# EAGLE board axiom_beta_shield_genio_v0.3_r1.2-Beta.41c98ec0 (EAGLE 7.7.0)
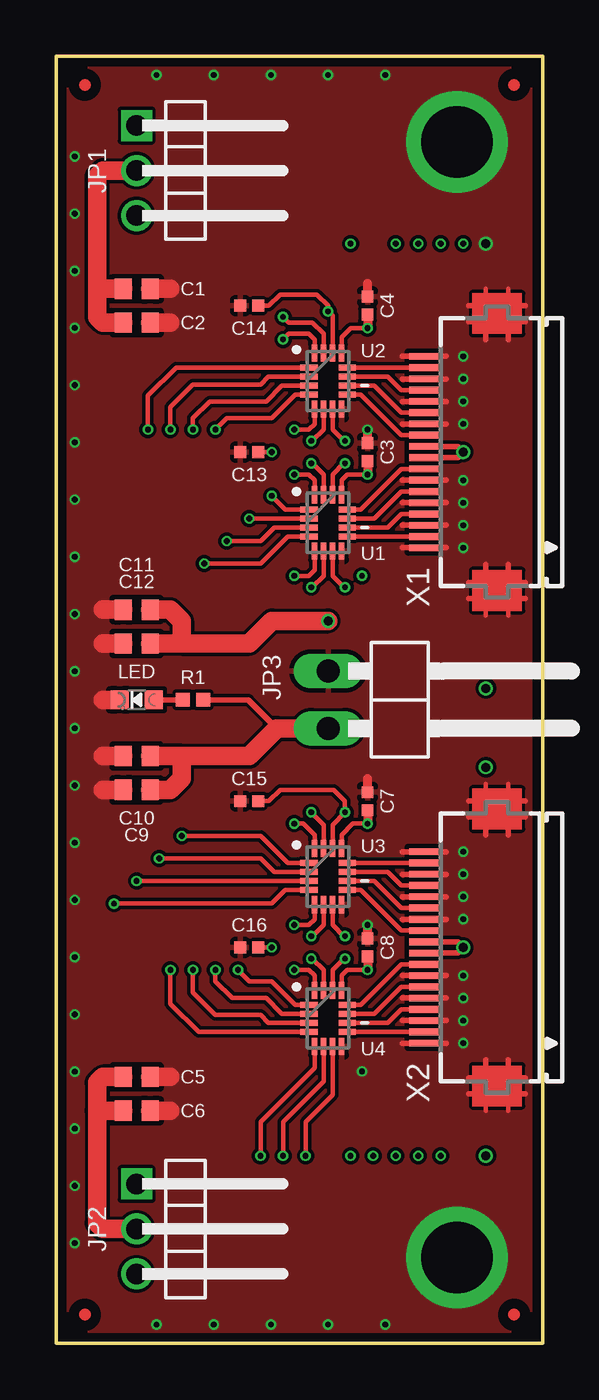
[diagram p0: board, top side]
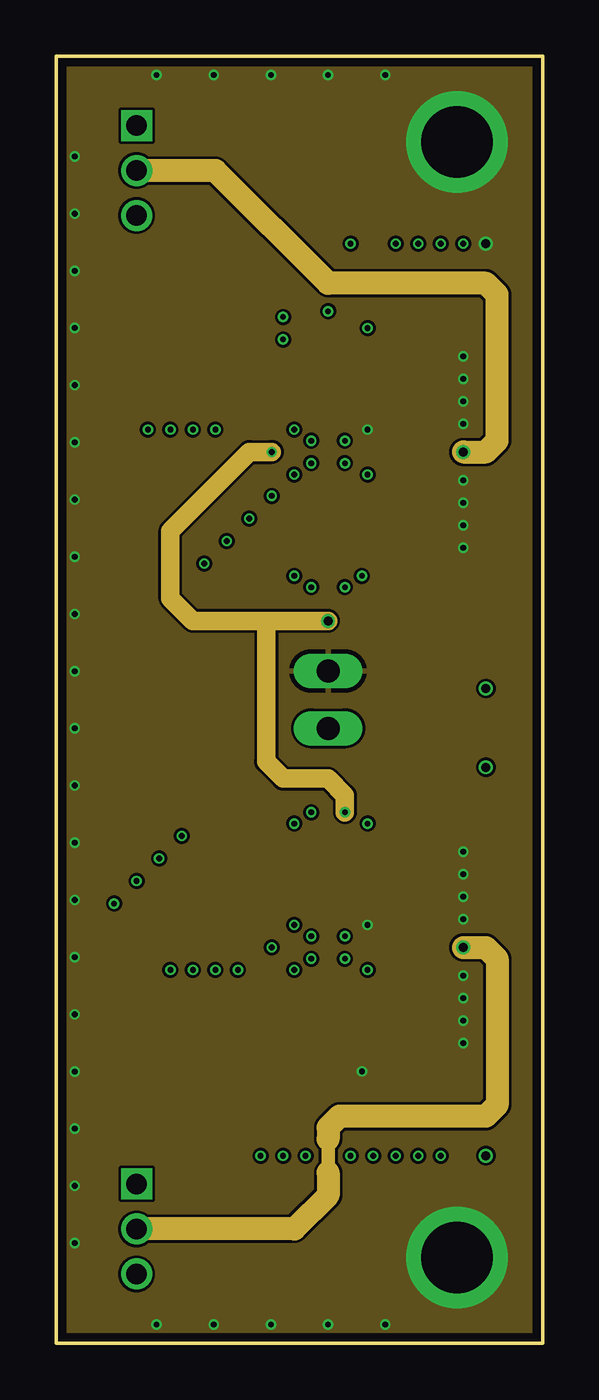
[diagram p1: board, inner layer Route2]
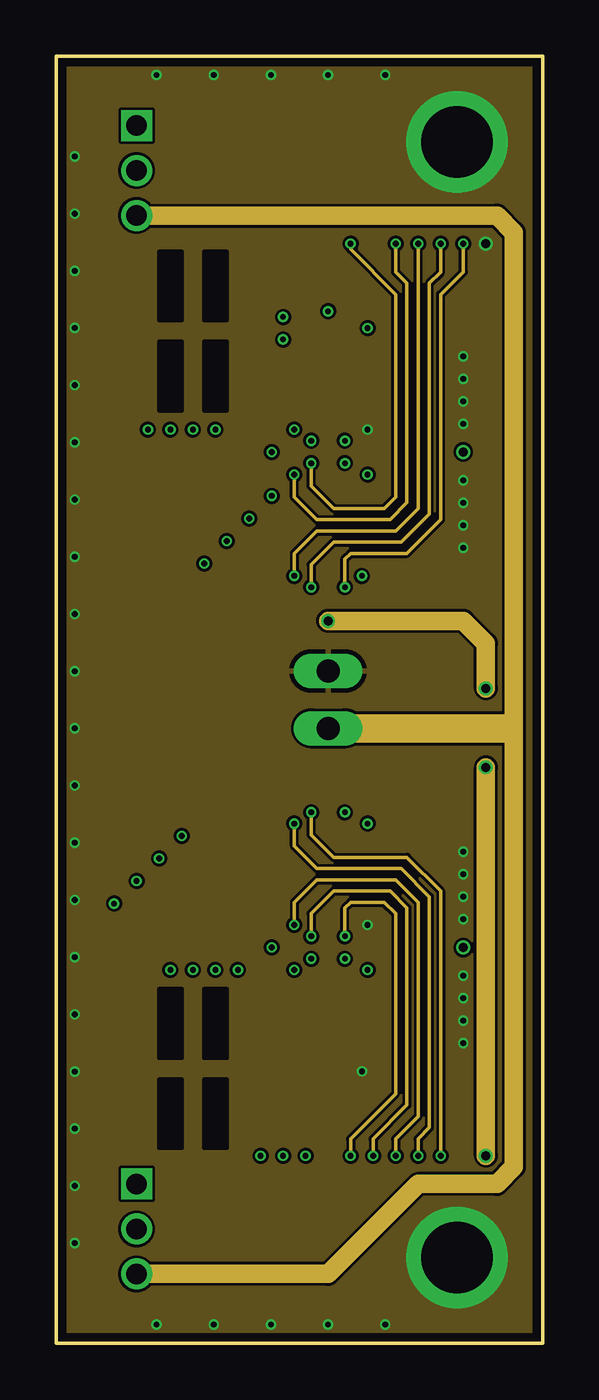
[diagram p2: board, inner layer Route15]
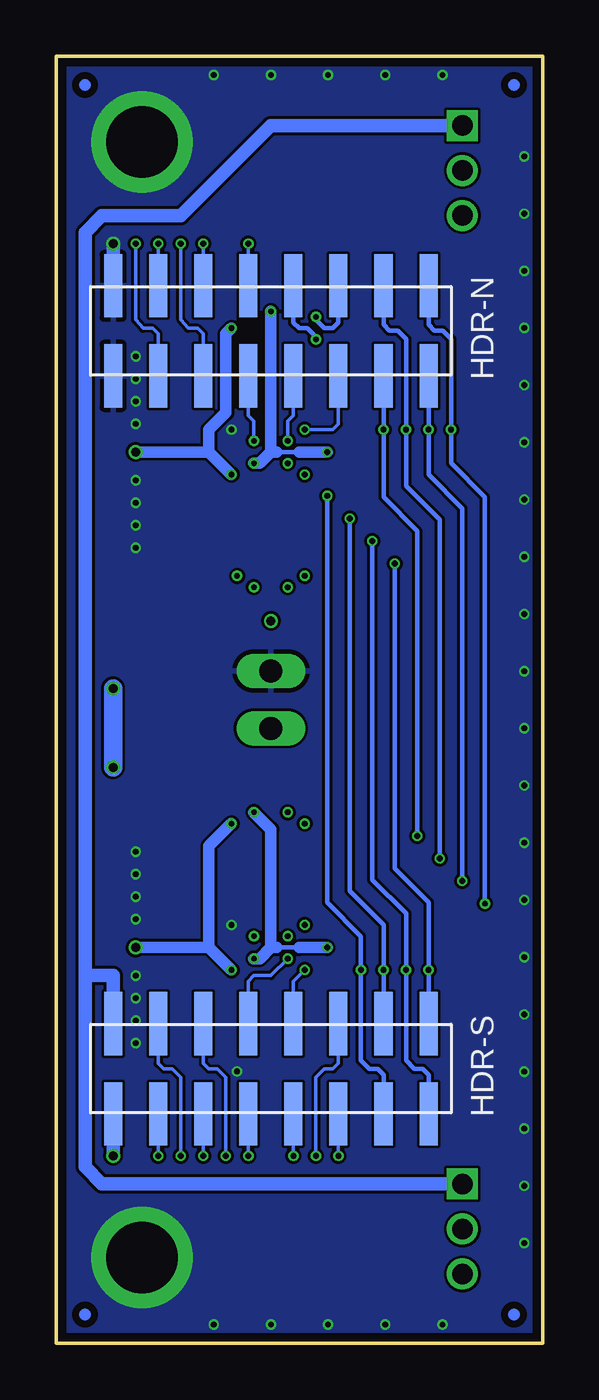
[diagram p3: board, bottom side, seen from below]

Size 21.59 x 57.15 mm. Coordinates in mm from the lower left corner, seen from the top.
Outline: 21.59,57.15 0,57.15 0,0 21.59,0 21.59,57.15
Copper layers (1+2*15+16): Top 0.035559375mm / dielectric 0.17018125mm / Route2 0.01778125mm / dielectric 47mil / Route15 0.01778125mm / dielectric 0.17018125mm / Bottom 0.035559375mm
Design rules "LaenPCBOrder4L_new": minimum track width 5mil, minimum drill 10mil, track to track 5mil, track to pad 5mil, pad to pad 5mil, via to via 5mil, smd to smd 5mil, copper to edge 15mil, drill to drill 5mil, minimum pad ring 4mil, minimum via ring 4mil, stop-mask expansion 2mil, vias tented up to drill 20mil, thermal gap 8mil
Net classes: 0 default: width 0.152 mm, drill 0.254 mm; 1 power: width 0.152 mm, drill 0.254 mm
tKeepout: area 15.3,50.8 to 20.3,55.8; area 15.3,1.3 to 20.3,6.3
bKeepout: area 15.3,50.8 to 20.3,55.8; area 15.3,1.3 to 20.3,6.3
tRestrict: area 19.8,0.7 to 20.9,1.8; area 19.8,55.3 to 20.9,56.4; area 0.7,55.3 to 1.8,56.4; area 0.7,0.7 to 1.8,1.8
bRestrict: area 19.8,0.7 to 20.9,1.8; area 19.8,55.3 to 20.9,56.4; area 0.7,55.3 to 1.8,56.4; area 0.7,0.7 to 1.8,1.8

## Footprints (pad centres in the part's own frame; a part is rotated, then mirrored left to right if it is on the bottom)
0603-C = smd 0.75 x 0.9: 1 -0.6,0; 2 0.6,0
0402-C = smd 0.52 x 0.52: 1 -0.4,0; 2 0.4,0
2X08M_SMD = smd 0.8 x 2.8: 1 -7,-2; 2 -7,2; 3 -5,-2; 4 -5,2; 5 -3,-2; 6 -3,2; 7 -1,-2; 8 -1,2; 9 1,-2; 10 1,2; 11 3,-2; 12 3,2; 13 5,-2; 14 5,2; 15 7,-2; 16 7,2
1X03M/90-S = drill 0.914 square: 1 -2,0 | drill 0.914: 2 0,0; 3 2,0
1X02/90 = drill 1.016 long: 1 -2.54,-3.81; 2 0,-3.81
CHIPLED_0603_NOOUTLINE = smd 0.8 x 0.8: A 0,-0.75; C 0,0.75
0402-B = smd 0.62 x 0.62: 1 -0.45,0; 2 0.45,0
QFN40P185X265X55-16N = smd 0.762 x 0.254: 1 -0.85,0.6; 2 -0.85,0.2; 3 -0.85,-0.2; 4 -0.85,-0.6; 9 0.85,-0.6; 10 0.85,-0.2; 11 0.85,0.2; 12 0.85,0.6 | smd 0.254 x 0.762: 5 -0.6,-1.25; 6 -0.2,-1.25; 7 0.2,-1.25; 8 0.6,-1.25; 13 0.6,1.25; 14 0.2,1.25; 15 -0.2,1.25; 16 -0.6,1.25
FH12-18S-0.5SH = smd 0.3 x 1.3: 1 -4.25,3.25; 2 -3.75,3.25; 3 -3.25,3.25; 4 -2.75,3.25; 5 -2.25,3.25; 6 -1.75,3.25; 7 -1.25,3.25; 8 -0.75,3.25; 9 -0.25,3.25; 10 0.25,3.25; 11 0.75,3.25; 12 1.25,3.25; 13 1.75,3.25; 14 2.25,3.25; 15 2.75,3.25; 16 3.25,3.25; 17 3.75,3.25; 18 4.25,3.25

## Placement (x,y rotation side)
C1  [0603-C]  3.56,46.83 0 top
C2  [0603-C]  3.56,45.33 0 top
C3  [0402-C]  13.81,39.58 90 top
C4  [0402-C]  13.81,46.08 90 top
C5  [0603-C]  3.56,11.82 0 top
C6  [0603-C]  3.56,10.32 0 top
C7  [0402-C]  13.81,24.07 90 top
C8  [0402-C]  13.81,17.57 90 top
C9  [0603-C]  3.56,24.57 180 top
C10  [0603-C]  3.56,26.07 180 top
C11  [0603-C]  3.56,32.58 180 top
C12  [0603-C]  3.56,31.07 180 top
C13  [0402-C]  8.56,39.58 180 top
C14  [0402-C]  8.56,46.08 180 top
C15  [0402-C]  8.56,24.07 180 top
C16  [0402-C]  8.56,17.57 180 top
HDR-N  [2X08M_SMD]  12.06,44.96 0 bottom
HDR-S  [2X08M_SMD]  12.06,12.19 0 bottom
JP1  [1X03M/90-S]  3.56,52.08 270 top
JP2  [1X03M/90-S]  3.56,5.07 270 top
JP3  [1X02/90]  15.88,27.3 270 top
LED  [CHIPLED_0603_NOOUTLINE]  3.56,28.57 90 top
R1  10k  [0402-B]  6.06,28.57 180 top
U1  SN74AVC4T774RSV  [QFN40P185X265X55-16N]  12.06,36.42 0 top
U2  SN74AVC4T774RSV  [QFN40P185X265X55-16N]  12.06,42.73 0 top
U3  SN74AVC4T774RSV  [QFN40P185X265X55-16N]  12.06,20.73 0 top
U4  SN74AVC4T774RSV  [QFN40P185X265X55-16N]  12.06,14.42 0 top
X1  FH12-18S-0.5SH  [FH12-18S-0.5SH]  19.56,39.58 90 top
X2  FH12-18S-0.5SH  [FH12-18S-0.5SH]  19.56,17.57 90 top

## Library data of the parts
C1-C16 R1 = generic-rcl
HDR-N HDR-S = pincon
JP1-JP3 = pinhead-2
LED = microbuilder
U1-U4 = lvltrans
X1 X2 = con-hirose; MPN: FH12-18S-0.5SH(55); OC_FARNELL: 1324547; OC_NEWARK: 34M6164

## Nets
0CH1: U1.9 X1.2
0CH2: U1.10 X1.4
0CH3: U1.11 X1.6
0CH4: U1.12 X1.8
0CH5: U2.9 X1.11
0CH6: U2.10 X1.13
0CH7: U2.11 X1.15
0CH8: U2.12 X1.17
0VCC: C1.1 C2.1 C3.1 C4.1 JP1.2 U1.13 U2.13 X1.9 X1.10
1CH1: U4.9 X2.2
1CH2: U4.10 X2.4
1CH3: U4.11 X2.6
1CH4: U4.12 X2.8
1CH5: U3.9 X2.11
1CH6: U3.10 X2.13
1CH7: U3.11 X2.15
1CH8: U3.12 X2.17
1VCC: C5.1 C6.1 C7.1 C8.1 JP2.2 U3.13 U4.13 X2.9 X2.10
3V3: HDR-S.2 JP1.1 JP2.1
GND: C1.2 C2.2 C3.2 C4.2 C5.2 C6.2 C7.2 C8.2 C9.2 C10.2 C11.2 C12.2 C13.2 C14.2 C15.2 C16.2 HDR-N.1 HDR-N.2 JP3.1 LED.C U1.8 U2.8 U3.8 U4.8 X1.1 X1.3 X1.5 X1.7 X1.12 X1.14 X1.16 X1.18 X2.1 X2.3 X2.5 X2.7 X2.12 X2.14 X2.16 X2.18
N$1: LED.A R1.2
SH_N_IO0: HDR-N.12 U2.15
SH_N_IO1: HDR-N.11 U2.5
SH_N_IO2: HDR-N.10 U2.16
SH_N_IO3: HDR-N.9 U2.6
SH_N_IO4: HDR-N.8 U1.15
SH_N_IO5: HDR-N.7 U2.7
SH_N_IO6: HDR-N.6 U1.16
SH_N_IO7: HDR-N.5 U1.5
SH_N_IO8: HDR-N.4 U1.6
SH_N_IO9: HDR-N.3 U1.7
SH_S_IO0: HDR-S.12 U4.6
SH_S_IO1: HDR-S.11 U4.5
SH_S_IO2: HDR-S.10 U4.16
SH_S_IO3: HDR-S.9 U4.7
SH_S_IO4: HDR-S.8 U4.15
SH_S_IO5: HDR-S.7 U3.7
SH_S_IO6: HDR-S.6 U3.6
SH_S_IO7: HDR-S.5 U3.5
SH_S_IO8: HDR-S.4 U3.16
SH_S_IO9: HDR-S.3 U3.15
VCCIO: C11.1 C12.1 C13.1 C14.1 C15.1 C16.1 HDR-S.1 U1.14 U2.14 U3.14 U4.14
VIN: C9.1 C10.1 JP1.3 JP2.3 JP3.2 R1.1
XX1_N: HDR-N.14 U2.3 U3.2
XX1_P: HDR-N.16 U2.1 U3.4
XX2_N: HDR-N.13 U2.4 U3.1
XX2_P: HDR-N.15 U2.2 U3.3
XX3_N: HDR-S.15 U1.3 U4.3
XX3_P: HDR-S.13 U1.1 U4.1
XX4_N: HDR-S.16 U1.4 U4.4
XX4_P: HDR-S.14 U1.2 U4.2

## Tracks (layer width: path | path; a pad name or v marks a point on that pad's centre or on a via)
0CH1
  Top 0.203: U1.9 X1.2
0CH2
  Top 0.203: X1.4 15.31,36.83 14.71,36.23 U1.10
0CH3
  Top 0.203: X1.6 15.31,37.83 14.11,36.62 U1.11
0CH4
  Top 0.203: X1.8 15.31,38.83 13.51,37.02 U1.12
0CH5
  Top 0.203: X1.11 15.31,40.33 13.51,42.12 U2.9
0CH6
  Top 0.203: X1.13 15.31,41.33 14.11,42.52 U2.10
0CH7
  Top 0.203: X1.15 15.31,42.33 14.71,42.92 U2.11
0CH8
  Top 0.203: U2.12 X1.17
0VCC  (via drill 0.25, 0.41)
  Top 0.203: v13.81,38.58 12.91,38.58 12.66,38.33 U1.13 | v13.81,45.08 13.06,45.08 12.66,44.67 U2.13
  Top 0.254: X1.10 17.81,39.83 v18.06,39.58 17.81,39.33 X1.9
  Top 0.406: C3.1 v13.81,38.58 | C4.1 v13.81,45.08
  Top 0.813: C2.1 2.06,45.33 1.81,45.58 1.81,46.83 | 1.81,46.83 C1.1 | 1.81,46.83 1.81,51.83 2.06,52.08 JP1.2
  Route2 1.016: v18.06,39.58 19.06,39.58 19.56,40.08 19.56,46.58 19.06,47.08 12.06,47.08 7.06,52.08 JP1.2
  Bottom 0.508: v13.81,45.08 14.06,44.83 14.06,41.33 14.81,40.58 14.81,39.58 | 14.81,39.58 v13.81,38.58 | 14.81,39.58 v18.06,39.58
1CH1
  Top 0.203: U4.9 X2.2
1CH2
  Top 0.203: X2.4 15.31,14.82 14.71,14.22 U4.10
1CH3
  Top 0.203: X2.6 15.31,15.82 14.11,14.62 U4.11
1CH4
  Top 0.203: X2.8 15.31,16.82 13.51,15.02 U4.12
1CH5
  Top 0.203: X2.11 15.31,18.32 13.51,20.12 U3.9
1CH6
  Top 0.203: X2.13 15.31,19.32 14.11,20.52 U3.10
1CH7
  Top 0.203: X2.15 15.31,20.32 14.71,20.92 U3.11
1CH8
  Top 0.203: U3.12 X2.17
1VCC  (via drill 0.25, 0.41)
  Top 0.203: v13.81,23.07 13.16,23.07 12.66,22.57 U3.13 | v13.81,16.57 12.91,16.57 12.66,16.32 U4.13
  Top 0.254: X2.10 17.81,17.82 v18.06,17.57 17.81,17.32 X2.9
  Top 0.406: C8.1 v13.81,16.57 | C7.1 v13.81,23.07
  Top 0.813: C5.1 2.06,11.82 1.81,11.57 1.81,10.32 | 1.81,10.32 C6.1 | 1.81,10.32 1.81,5.32 2.06,5.07 JP2.2
  Route2 0.61: 12.06,9.07 12.06,7.57
  Route2 1.016: v18.06,17.57 19.06,17.57 19.56,17.07 19.56,10.57 19.06,10.07 12.56,10.07 12.06,9.57 12.06,9.07 | 12.06,7.57 12.06,6.57 10.56,5.07 JP2.2
  Bottom 0.508: v13.81,16.57 14.81,17.57 | 14.81,17.57 v18.06,17.57 | v13.81,23.07 14.81,22.07 14.81,17.57
3V3
  Bottom 0.61: HDR-S.2 19.06,16.32 20.31,16.32 | 20.31,16.32 20.31,49.33 19.56,50.08 16.06,50.08 12.06,54.08 JP1.1 | 20.31,16.32 20.31,7.82 19.56,7.07 JP2.1
GND  (via drill 0.25, 0.41, 3.17 pad 4.5)
  Top 0.203: 19.06,46.08 19.06,46.83 | 20.06,46.08 20.06,46.83 | 19.06,33.08 19.06,32.33 | 20.06,33.08 20.06,32.33 | 19.06,24.07 19.06,24.82 | 20.06,24.07 20.06,24.82 | 19.06,11.07 19.06,10.32 | 20.06,11.07 20.06,10.32
  Top 0.254: 18.31,33.08 19.06,33.08 | 19.06,33.08 20.06,33.08 | 20.06,33.08 20.81,33.08 | 18.31,33.77 19.06,33.77 | 19.06,33.77 20.06,33.77 | 20.06,33.77 20.81,33.77 | 19.06,33.08 19.06,33.77 | 20.06,33.08 20.06,33.77 | 18.31,46.08 19.06,46.08 | 19.06,46.08 20.06,46.08 | 20.06,46.08 20.81,46.08 | 15.36,35.33 X1.1 17.31,35.33 | 15.36,36.33 X1.3 17.31,36.33 | 15.36,37.33 X1.5 17.31,37.33 | 15.36,38.33 X1.7 17.31,38.33 | 15.36,40.83 X1.12 17.31,40.83 | 15.36,41.83 X1.14 17.31,41.83 | 15.36,42.83 X1.16 17.31,42.83 | 15.36,43.83 X1.18 17.31,43.83 | 20.81,45.38 20.06,45.38 | 20.06,45.38 19.06,45.38 | 19.06,45.38 18.31,45.38 | 20.06,46.08 20.06,45.38 | 19.06,46.08 19.06,45.38 | 19.06,33.77 19.06,34.58 | 20.06,33.77 20.06,34.58 | 19.06,45.38 19.06,44.58 | 20.06,45.38 20.06,44.58 | 17.31,13.32 X2.1 15.36,13.32 | 17.31,14.32 X2.3 15.36,14.32 | 17.31,15.32 X2.5 15.36,15.32 | 17.31,16.32 X2.7 15.36,16.32 | 17.31,18.82 X2.12 15.36,18.82 | 17.31,19.82 X2.14 15.36,19.82 | 17.31,20.82 X2.16 15.36,20.82 | 17.31,21.82 X2.18 15.36,21.82 | 18.31,11.07 19.06,11.07 | 19.06,11.07 20.06,11.07 | 20.06,11.07 20.81,11.07 | 18.31,11.77 19.06,11.77 | 19.06,11.77 20.06,11.77 | 20.06,11.77 20.81,11.77 | 19.06,11.07 19.06,11.77 | 20.06,11.07 20.06,11.77 | 18.31,24.07 19.06,24.07 | 19.06,24.07 20.06,24.07 | 20.06,24.07 20.81,24.07 | 20.81,23.38 20.06,23.38 | 20.06,23.38 19.06,23.38 | 19.06,23.38 18.31,23.38 | 20.06,24.07 20.06,23.38 | 19.06,24.07 19.06,23.38 | 19.06,11.77 19.06,12.57 | 20.06,11.77 20.06,12.57 | 19.06,23.38 19.06,22.57 | 20.06,23.38 20.06,22.57
  Top 0.406: C3.2 v13.81,40.58 | C8.2 v13.81,18.57 | C7.2 13.81,25.07 | C4.2 13.81,47.08
  Top 0.813: C11.2 2.06,32.58 | C12.2 2.06,31.07 | LED.C 2.06,28.57 | C10.2 2.06,26.07 | C9.2 2.06,24.57 | C5.2 5.06,11.82 | C6.2 5.06,10.32 | C1.2 5.06,46.83 | C2.2 5.06,45.33
  Bottom 0.61: HDR-N.2 v19.06,48.83
  other vias: 17.78,3.81 17.78,53.34 14.61,0.82 12.06,0.82 9.52,0.82 6.98,0.82 4.44,0.82 0.81,6.98 0.81,9.52 0.81,12.06 0.81,14.6 0.81,17.14 0.81,19.68 0.81,22.23 0.81,24.77 0.81,27.3 0.81,29.84 0.81,32.38 0.81,34.92 0.81,37.47 0.81,40 0.81,42.55 0.81,45.09 0.81,47.62 0.81,50.16 0.81,52.7 0.81,4.45 14.61,56.33 12.06,56.33 9.52,56.33 6.98,56.33 4.44,56.33 13.56,12.07 18.06,43.83 18.06,42.83 18.06,41.83 18.06,40.83 18.06,38.33 18.06,37.33 18.06,36.33 18.06,35.33 18.06,21.82 18.06,20.82 18.06,19.82 18.06,18.82 18.06,16.32 18.06,15.32 18.06,14.32 18.06,13.32
  pour Top (isolate 0.15, rank 3): 21.59,0 0,0 0,57.15 21.59,57.15
  pour Bottom (rank 3): 21.59,0 0,0 0,57.15 21.59,57.15
  pour Route2 (rank 3): 21.59,0 0,0 0,57.15 21.59,57.15
  pour Route15 (rank 3): 21.59,0 0,0 0,57.15 21.59,57.15
  cutout Top: 15.49,35.15 15.49,44 arc-90 15.64,44.15 16.99,44.15 arc-90 17.14,44 17.14,35.15 arc-90 16.99,35 15.64,35 arc-90
  cutout Top: 15.49,13.15 15.49,22 arc-90 15.64,22.15 16.99,22.15 arc-90 17.14,22 17.14,13.15 arc-90 16.99,13 15.64,13 arc-90
  cutout Top: 2.39,9.85 2.39,10.8 arc-90 2.54,10.95 4.59,10.95 arc-90 4.74,10.8 4.74,9.85 arc-90 4.59,9.7 2.54,9.7 arc-90
  cutout Top: 2.39,11.35 2.39,12.3 arc-90 2.54,12.45 4.59,12.45 arc-90 4.74,12.3 4.74,11.35 arc-90 4.59,11.2 2.54,11.2 arc-90
  cutout Top: 2.39,46.35 2.39,47.3 arc-90 2.54,47.45 4.59,47.45 arc-90 4.74,47.3 4.74,46.35 arc-90 4.59,46.2 2.54,46.2 arc-90
  cutout Top: 2.39,44.85 2.39,45.8 arc-90 2.54,45.95 4.59,45.95 arc-90 4.74,45.8 4.74,44.85 arc-90 4.59,44.7 2.54,44.7 arc-90
  cutout Top: 2.39,32.1 2.39,33.05 arc-90 2.54,33.2 4.59,33.2 arc-90 4.74,33.05 4.74,32.1 arc-90 4.59,31.95 2.54,31.95 arc-90
  cutout Top: 2.39,30.6 2.39,31.55 arc-90 2.54,31.7 4.59,31.7 arc-90 4.74,31.55 4.74,30.6 arc-90 4.59,30.45 2.54,30.45 arc-90
  cutout Top: 2.39,25.6 2.39,26.55 arc-90 2.54,26.7 4.59,26.7 arc-90 4.74,26.55 4.74,25.6 arc-90 4.59,25.45 2.54,25.45 arc-90
  cutout Top: 2.39,24.1 2.39,25.05 arc-90 2.54,25.2 4.59,25.2 arc-90 4.74,25.05 4.74,24.1 arc-90 4.59,23.95 2.54,23.95 arc-90
  cutout Top: 2.24,28.15 2.24,29 arc-90 2.39,29.15 4.74,29.15 arc-90 4.89,29 4.89,28.15 arc-90 4.74,28 2.39,28 arc-90
GND2  (via drill 0.25)
  other vias: 13.56,34.08
N$1
  Top 0.254: LED.A R1.2
N$21
  cutout Route15: 4.56,15.72 5.56,15.72 5.56,12.67 4.56,12.67
  cutout Route15: 6.56,15.72 7.56,15.72 7.56,12.67 6.56,12.67
  cutout Route15: 6.56,11.72 7.56,11.72 7.56,8.68 6.56,8.68
  cutout Route15: 4.56,11.72 5.56,11.72 5.56,8.68 4.56,8.68
  cutout Route15: 5.56,45.42 4.56,45.42 4.56,48.47 5.56,48.47
  cutout Route15: 7.56,45.42 6.56,45.42 6.56,48.47 7.56,48.47
  cutout Route15: 7.56,41.42 6.56,41.42 6.56,44.48 7.56,44.48
  cutout Route15: 5.56,41.42 4.56,41.42 4.56,44.48 5.56,44.48
SH_N_IO0  (via drill 0.25)
  Top 0.203: U2.15 11.87,44.83 11.37,45.33 10.31,45.33 v10.06,45.58
  Bottom 0.203: HDR-N.12 9.06,45.33 9.31,45.08 9.69,45.08 10.06,45.45 v10.06,45.58
SH_N_IO1  (via drill 0.25)
  Top 0.203: U2.5 11.46,40.83 11.21,40.58 v10.56,40.58
  Bottom 0.152: v10.56,40.58 9.31,40.58 9.06,40.83 HDR-N.11
SH_N_IO2  (via drill 0.25)
  Top 0.203: U2.16 11.46,44.58 11.21,44.83 10.31,44.83 v10.06,44.58
  Bottom 0.203: HDR-N.10 11.06,45.33 10.81,45.08 10.44,45.08 10.06,44.7 v10.06,44.58
SH_N_IO3  (via drill 0.25)
  Top 0.203: U2.6 11.87,40.58 11.37,40.08 v11.31,40.08
  Bottom 0.152: v11.31,40.08 11.31,40.95 11.06,41.2 HDR-N.9
SH_N_IO4  (via drill 0.25)
  Top 0.203: U1.15 11.87,38.58 11.37,39.08 v11.31,39.08
  Route15 0.152: v11.31,39.08 11.31,38.08 12.31,37.08 14.56,37.08 15.06,37.58 15.06,46.58 13.06,48.58 v13.06,48.83
  Bottom 0.152: HDR-N.8 v13.06,48.83
SH_N_IO5  (via drill 0.25)
  Top 0.203: U2.7 12.26,40.58 12.76,40.08 v12.81,40.08
  Bottom 0.152: v12.81,40.08 12.81,40.95 13.06,41.2 HDR-N.7
SH_N_IO6  (via drill 0.25)
  Top 0.203: U1.16 11.46,38.33 11.21,38.58 v10.56,38.58
  Route15 0.152: v10.56,38.58 10.56,37.58 11.56,36.58 14.81,36.58 15.56,37.33 15.56,47.08 15.06,47.58 v15.06,48.83
  Bottom 0.152: HDR-N.6 v15.06,48.83
SH_N_IO7  (via drill 0.25)
  Top 0.203: v10.56,34.08 11.21,34.08 11.46,34.33 U1.5
  Route15 0.152: v16.06,48.83 16.06,37.08 15.06,36.08 11.56,36.08 10.56,35.08 v10.56,34.08
  Bottom 0.152: HDR-N.5 15.06,44.83 15.31,45.08 15.74,45.08 16.06,45.45 v16.06,48.83
SH_N_IO8  (via drill 0.25)
  Top 0.203: v11.31,33.58 11.37,33.58 11.87,34.08 U1.6
  Route15 0.152: v11.31,33.58 11.31,34.58 12.31,35.58 15.31,35.58 16.56,36.83 16.56,47.08 17.06,47.58 v17.06,48.83
  Bottom 0.152: HDR-N.4 v17.06,48.83
SH_N_IO9  (via drill 0.25)
  Top 0.203: v12.81,33.58 12.76,33.58 12.26,34.08 U1.7
  Route15 0.152: v12.81,33.58 12.81,34.83 13.06,35.08 15.56,35.08 17.06,36.58 17.06,46.58 18.06,47.58 v18.06,48.83
  Bottom 0.152: HDR-N.3 17.06,44.83 17.31,45.08 17.74,45.08 18.06,45.45 v18.06,48.83
SH_S_IO0  (via drill 0.25)
  Top 0.203: U4.6 11.87,11.62 10.06,9.82 v10.06,8.32
  Bottom 0.152: HDR-S.12 9.06,12.43 9.31,12.18 9.69,12.18 10.06,11.8 v10.06,8.32
SH_S_IO1  (via drill 0.25)
  Top 0.203: U4.5 11.46,12.22 9.06,9.82 v9.06,8.32
  Bottom 0.152: HDR-S.11 v9.06,8.32
SH_S_IO2  (via drill 0.25)
  Top 0.203: U4.16 11.46,16.32 11.21,16.57 v10.56,16.57
  Bottom 0.152: v10.56,16.57 11.06,16.07 HDR-S.10
SH_S_IO3  (via drill 0.25)
  Top 0.203: U4.7 12.26,11.02 11.06,9.82 v11.06,8.32
  Bottom 0.152: HDR-S.9 v11.06,8.32
SH_S_IO4  (via drill 0.25)
  Top 0.203: U4.15 11.87,16.57 11.37,17.07 v11.31,17.07
  Bottom 0.152: v11.31,17.07 12.06,16.32 12.81,16.32 13.06,16.07 HDR-S.8
SH_S_IO5  (via drill 0.25)
  Top 0.203: U3.7 12.26,18.57 12.76,18.07 v12.81,18.07
  Route15 0.152: v12.81,18.07 12.81,19.32 13.06,19.57 14.56,19.57 15.06,19.07 15.06,11.07 13.06,9.07 v13.06,8.32
  Bottom 0.152: HDR-S.7 v13.06,8.32
SH_S_IO6  (via drill 0.25)
  Top 0.203: U3.6 11.87,18.57 11.37,18.07 v11.31,18.07
  Route15 0.152: v11.31,18.07 11.31,19.07 12.31,20.07 14.81,20.07 15.56,19.32 15.56,10.57 14.06,9.07 v14.06,8.32
  Bottom 0.152: HDR-S.6 15.06,12.43 14.81,12.18 14.44,12.18 14.06,11.8 v14.06,8.32
SH_S_IO7  (via drill 0.25)
  Top 0.203: U3.5 11.46,18.82 11.21,18.57 v10.56,18.57
  Route15 0.152: v10.56,18.57 10.56,19.57 11.56,20.57 15.06,20.57 16.06,19.57 16.06,10.07 15.06,9.07 v15.06,8.32
  Bottom 0.152: HDR-S.5 v15.06,8.32
SH_S_IO8  (via drill 0.25)
  Top 0.203: v10.56,23.07 10.96,23.07 11.46,22.57 U3.16
  Route15 0.152: v10.56,23.07 10.56,22.07 11.56,21.07 15.31,21.07 16.56,19.82 16.56,9.57 16.06,9.07 v16.06,8.32
  Bottom 0.152: HDR-S.4 17.06,12.43 16.81,12.18 16.44,12.18 16.06,11.8 v16.06,8.32
SH_S_IO9  (via drill 0.25)
  Top 0.203: v11.31,23.57 11.87,23.02 U3.15
  Route15 0.152: v17.06,8.32 17.06,20.07 15.56,21.57 12.31,21.57 11.31,22.57 v11.31,23.57
  Bottom 0.152: HDR-S.3 v17.06,8.32
VCCIO  (via drill 0.25, 0.41)
  Top 0.203: v12.81,39.08 12.76,39.08 12.26,38.58 U1.14 | v12.81,17.07 12.76,17.07 12.26,16.57 U4.14 | U2.14 12.26,45.62 v12.06,45.83 12.06,46.08 11.56,46.58 9.94,46.58 9.44,46.08 C14.1 | U3.14 12.26,23.02 v12.81,23.57 12.81,24.07 12.31,24.57 9.94,24.57 9.44,24.07 C15.1 | C16.1 v9.56,17.57 | C13.1 v9.56,39.58
  Top 0.813: C11.1 5.06,32.58 5.56,32.08 5.56,31.07 | 5.56,31.07 C12.1 | 5.56,31.07 8.56,31.07 9.56,32.08 v12.06,32.08
  Route2 0.813: v12.06,32.08 9.31,32.08 | 9.31,32.08 6.06,32.08 5.06,33.08 5.06,36.08 8.56,39.58 v9.56,39.58 | 9.31,32.08 9.31,25.82 10.06,25.07 12.06,25.07 12.81,24.32 v12.81,23.57
  Route15 0.813: v19.06,8.32 v19.06,25.57 | v19.06,29.07 19.06,31.07 18.06,32.08 v12.06,32.08
  Bottom 0.203: 10.81,39.58 11.81,39.58 | 10.81,17.57 11.81,17.57
  Bottom 0.508: v9.56,39.58 10.81,39.58 | 11.81,39.58 12.06,39.58 | 12.06,39.58 12.56,39.08 v12.81,39.08 | v9.56,17.57 10.81,17.57 | 11.81,17.57 12.06,17.57 | 12.06,17.57 12.56,17.07 v12.81,17.07 | 12.06,39.58 v12.06,45.83 | 12.06,17.57 12.06,22.82 v12.81,23.57
  Bottom 0.61: HDR-S.1 v19.06,8.32
  Bottom 0.813: v19.06,25.57 v19.06,29.07
VIN
  Top 0.254: 9.79,27.3 8.52,28.57 R1.1
  Top 0.813: C9.1 5.06,24.57 5.56,25.07 5.56,26.07 | 5.56,26.07 C10.1 | 5.56,26.07 8.56,26.07 9.79,27.3 JP3.2
  Route15 0.61: 19.96,27.3 20.31,27.3
  Route15 0.813: JP1.3 19.56,50.08 20.31,49.33 20.31,27.3 20.31,7.82 19.56,7.07 16.06,7.07 12.06,3.07 JP2.3
  Route15 1.27: JP3.2 19.96,27.3
XX1_N  (via drill 0.25)
  Top 0.203: U2.3 10.02,42.52 9.31,41.83 6.81,41.83 6.06,41.08 v6.06,40.58 | U3.2 9.66,20.92 9.06,21.52 v4.56,21.52
  Bottom 0.203: HDR-N.14 7.06,45.22 6.81,44.97 6.44,44.97 6.06,44.6 v6.06,40.58 6.06,38.08 4.56,36.58 v4.56,21.52
XX1_P  (via drill 0.25)
  Top 0.203: U2.1 5.31,43.33 4.06,42.08 v4.06,40.58 | U3.4 10.16,20.12 9.56,19.52 v2.56,19.52
  Bottom 0.203: HDR-N.16 5.06,45.22 4.81,44.97 4.44,44.97 4.06,44.6 v4.06,40.58 4.06,39.08 2.56,37.58 v2.56,19.52
XX2_N  (via drill 0.25)
  Top 0.203: U2.4 10.62,42.12 9.56,41.08 7.56,41.08 v7.06,40.58 | U3.1 10.26,21.32 9.06,22.52 v5.56,22.52
  Bottom 0.203: HDR-N.13 v7.06,40.58 7.06,37.58 5.56,36.08 v5.56,22.52
XX2_P  (via drill 0.25)
  Top 0.203: U2.2 9.41,42.92 9.06,42.58 6.06,42.58 5.06,41.58 v5.06,40.58 | U3.3 v3.56,20.52
  Bottom 0.203: HDR-N.15 v5.06,40.58 5.06,38.58 3.56,37.08 v3.56,20.52
XX3_N  (via drill 0.25)
  Top 0.203: v7.56,35.62 9.06,35.62 9.66,36.23 U1.3 | U4.3 9.41,14.22 9.06,14.57 7.06,14.57 6.06,15.57 v6.06,16.57
  Bottom 0.203: HDR-S.15 5.06,11.93 5.31,12.18 5.69,12.18 6.06,12.55 v6.06,16.57 6.06,19.07 7.56,20.57 v7.56,35.62
XX3_P  (via drill 0.25)
  Top 0.203: U1.1 10.16,37.02 v9.56,37.62 | U4.1 10.62,15.02 9.56,16.07 8.56,16.07 v8.06,16.57
  Bottom 0.203: HDR-S.13 7.06,11.93 7.31,12.18 7.69,12.18 8.06,12.55 v8.06,16.57 8.06,18.07 9.56,19.57 v9.56,37.62
XX4_N  (via drill 0.25)
  Top 0.203: U1.4 10.26,35.83 9.06,34.62 v6.56,34.62 | U4.4 6.31,13.82 5.06,15.07 v5.06,16.57
  Bottom 0.203: HDR-S.16 v5.06,16.57 5.06,19.57 6.56,21.07 v6.56,34.62
XX4_P  (via drill 0.25)
  Top 0.203: U1.2 v8.56,36.62 | U4.2 10.02,14.62 9.31,15.32 7.81,15.32 7.06,16.07 v7.06,16.57
  Bottom 0.203: HDR-S.14 v7.06,16.57 7.06,18.57 8.56,20.07 v8.56,36.62
(copper drawn outside any net)
  shapes: Bottom circle x4, Top circle x4

## Text on the board
_bSilk: Copyright (C) 2019 / Herbert Pötzl | V0.3 / R1.2